# EAGLE board side panel V5.1 (EAGLE 8.3.1)
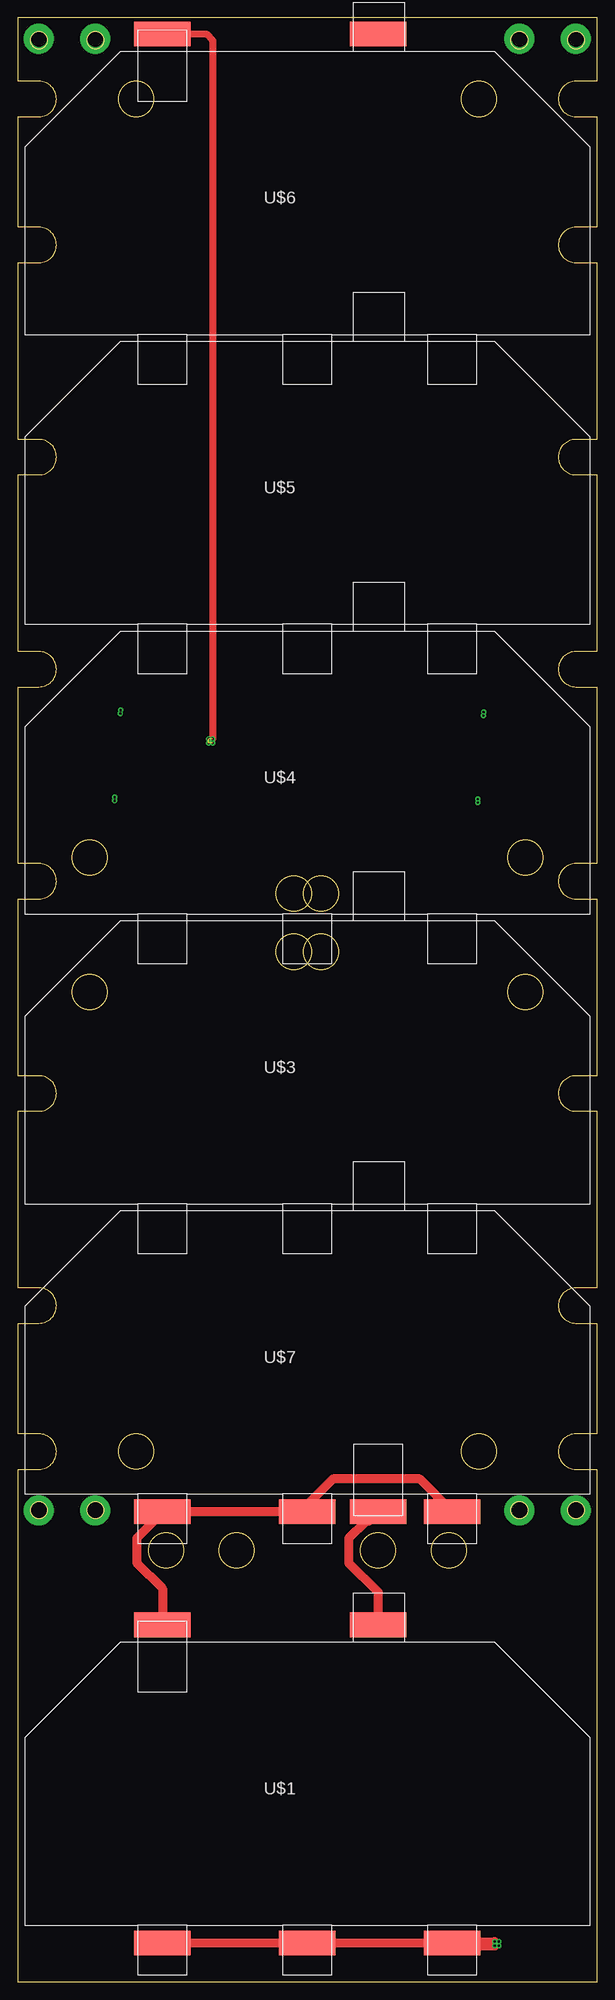
[diagram p0: board, top side]
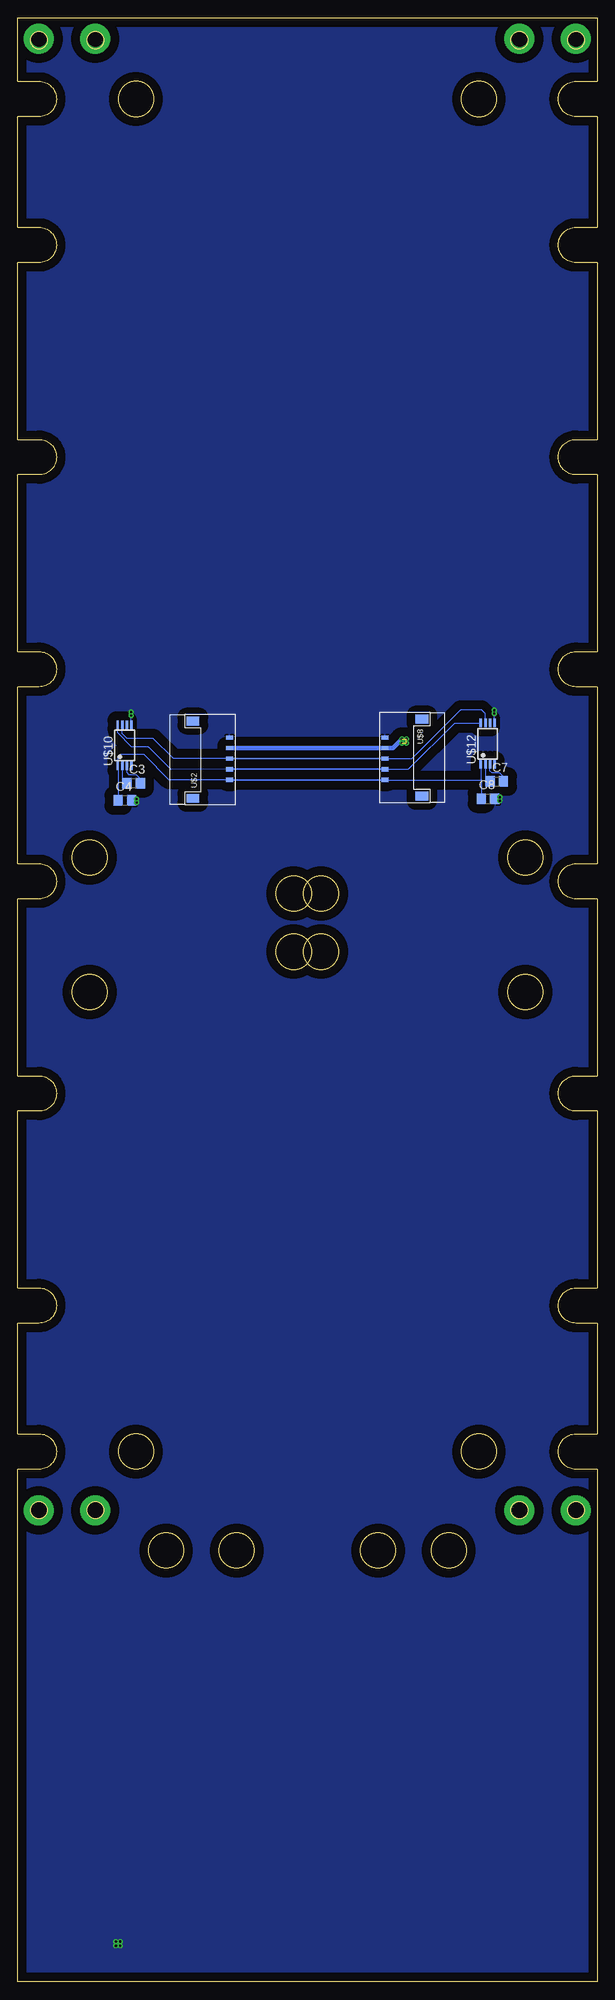
[diagram p1: board, bottom side, seen from below]

Size 82 x 277.8 mm. Coordinates in mm from the lower left corner, seen from the top.
Outline: 79,248.15 arc180 79,243.15 82,243.15 82,218.15 79,218.15 arc180 79,213.15 82,213.15 82,188.15 79,188.15 arc180 79,183.15 82,183.15 82,158.15 79,158.15 arc180 79,153.15 82,153.15 82,128.15 79,128.15 arc180 79,123.15 82,123.15 82,98.15 79,98.15 arc180 79,93.15 82,93.15 82,77.5 79,77.5 arc180 79,72.5 82,72.5 82,0 0,0 0,72.5 3,72.5 arc180 3,77.5 0,77.5 0,93.15 3,93.15 arc180 3,98.15 0,98.15 0,123.15 3,123.15 arc180 3,128.15 0,128.15 0,153.15 3,153.15 arc180 3,158.15 0,158.15 0,183.15 3,183.15 arc180 3,188.15 0,188.15 0,213.15 3,213.15 arc180 3,218.15 0,218.15 0,243.15 3,243.15 arc180 3,248.15 0,248.15 0,263.8 3,263.8 arc180 3,268.8 0,268.8 0,277.8 82,277.8 82,268.8 79,268.8 arc180 79,263.8 82,263.8 82,248.15 79,248.15
Outline: circle at 21,61 radius 2.5
Outline: circle at 65.26,75 radius 2.5
Outline: circle at 51,61 radius 2.5
Outline: circle at 65.26,266.3 radius 2.5
Outline: circle at 16.74,75 radius 2.5
Outline: circle at 16.74,266.3 radius 2.5
Outline: circle at 61,61 radius 2.5
Outline: circle at 31,61 radius 2.5
Outline: circle at 3,274.6 radius 1.19
Outline: circle at 11,274.6 radius 1.19
Outline: circle at 11,66.7 radius 1.19
Outline: circle at 3,66.7 radius 1.19
Outline: circle at 71,66.7 radius 1.19
Outline: circle at 79,66.7 radius 1.19
Outline: circle at 71,274.6 radius 1.19
Outline: circle at 79,274.6 radius 1.19
Outline: circle at 71.83,139.97 radius 2.5
Outline: circle at 42.93,145.69 radius 2.5
Outline: circle at 42.93,153.94 radius 2.5
Outline: circle at 71.83,159.03 radius 2.5
Copper layers (1*16): Top 0.035mm / dielectric 1.5mm / Bottom 0.035mm
Design rules "default": minimum track width 10mil, minimum drill 24mil, track to track 8mil, track to pad 8mil, pad to pad 8mil, via to via 8mil, smd to smd 8mil, copper to edge 40mil, drill to drill 8mil, minimum pad ring 10mil, minimum via ring 8mil, stop-mask expansion 4mil, vias tented up to drill 0mil, thermal gap 10mil

## Footprints (pad centres in the part's own frame; a part is rotated, then mirrored left to right if it is on the bottom)
R0805 = smd 1.3 x 1.5: 1 -0.95,0; 2 0.95,0
C0805 = smd 1.3 x 1.5: 1 -0.95,0; 2 0.95,0
SOLAR_CELL_STAND-ALONE = smd 8 x 3.5: P$1 19.5,-2.5; P$2 40,-2.5; P$3 60.5,-2.5; P$4 50,42.5; P$5 19.5,42.5
PICOLOCK_5 = smd 1.25 x 1.8: MNT@1 -2.605,5.2; MNT@2 8.305,5.2 | smd 0.6 x 1: P$1 0,0; P$2 1.5,0; P$3 3,0; P$4 4.5,0; P$5 6,0
SOLAR_CELL_TOP_SHORT-PAD = smd 8 x 3.5: P$1 50,42.5; P$2 19.5,42.5
SOLAR_CELL_BOTTOM+BYPASS = smd 8 x 3.5: P$1 19.5,-2.5; P$2 40,-2.5; P$3 60.5,-2.5; P$4 50,-2.5
TSSOP-8 = smd 1.2 x 0.35: 1 -4.175,1.725; 2 -4.175,1.075; 3 -4.175,0.425; 4 -4.175,-0.225; 5 1.675,-0.225; 6 1.675,0.425; 7 1.675,1.075; 8 1.675,1.725

## Placement (x,y rotation side)
C3  100pF  [R0805]  65.59,169.54 0 bottom
C4  [C0805]  66.84,167.1 0 bottom
C7  100pF  [R0805]  14.2,169.78 0 bottom
C8  [C0805]  15.45,167.34 0 bottom
U$1  SOLAR_CELL_STAND-ALONE  [SOLAR_CELL_STAND-ALONE]  1,8 0 top
U$2  PICOLOCK_5  [PICOLOCK_5]  52,170 90 bottom
U$3  SOALAR_CELL_OUTLINE  [SOLAR_CELL_OUTLINE]  1,110 0 top
U$4  SOALAR_CELL_OUTLINE  [SOLAR_CELL_OUTLINE]  1,151 0 top
U$5  SOALAR_CELL_OUTLINE  [SOLAR_CELL_OUTLINE]  1,192 0 top
U$6  SOLAR_CELL_TOP  [SOLAR_CELL_TOP_SHORT-PAD]  1,233 0 top
U$7  SOLAR_CELL_BOTTOM+BYPASS  [SOLAR_CELL_BOTTOM+BYPASS]  1,69 0 top
U$8  PICOLOCK_5  [PICOLOCK_5]  30,176 270 bottom
U$10  TMP411  [TSSOP-8]  66.13,176.13 90 bottom
U$12  TMP411  [TSSOP-8]  14.74,176.37 90 bottom

## Library data of the parts
C3 C7 = Battery board V4.1 - simple signals
C4 C8 = Battery board V4.1 - simple signals; SPICEMODEL: NONE; SPICEPREFIX: C
U$1-U$8 U$10 U$12 = DubSat1 Components

## Nets
GND: C4.2 C8.2 U$1.P$1 U$1.P$2 U$1.P$3 U$2.P$5 U$8.P$1 U$10.5 U$12.5
N$9: U$1.P$4 U$7.P$4
N$10: U$1.P$5 U$7.P$1 U$7.P$2 U$7.P$3
N$13: C3.1 U$10.2
N$14: C3.2 U$10.3
N$17: C7.1 U$12.2
N$18: C7.2 U$12.3
POWER: U$2.P$4 U$6.P$2 U$8.P$2
SCL: U$2.P$2 U$8.P$4 U$10.8 U$12.8
SDA: U$2.P$3 U$8.P$3 U$10.7 U$12.7
VS: C4.1 C8.1 U$2.P$1 U$8.P$5 U$10.1 U$12.1

## Tracks (layer width: path | path; a pad name or v marks a point on that pad's centre or on a via)
GND  (via drill 0.3)
  Top 1.27: U$1.P$1 U$1.P$2 U$1.P$3 | U$1.P$3 61.7,5.7 v67.5,5.7 | U$1.P$3 61.9,5.1 v67.5,5.1
  Bottom 0.152: U$10.5 65.92,177.83 v65.92,179.11 65.94,179.13 v65.94,179.6 | U$12.5 14.53,178.07 v14.53,179.35 14.55,179.37 v14.55,179.84
  other vias: 68.1,5.7 68.1,5.1 65.14,166.8 65.14,167.3 13.75,167.04 13.75,167.54
  pour Bottom (isolate 1.27): 0,0 0,277.8 82,277.8 82,0
N$1  (via drill 2.2 pad 4.24)
  other vias: 3,274.8
N$2  (via drill 2.2 pad 4.24)
  other vias: 11,274.8
N$3  (via drill 2.2 pad 4.24)
  other vias: 3,66.7
N$4  (via drill 2.2 pad 4.24)
  other vias: 11,66.7
N$5  (via drill 2.2 pad 4.24)
  other vias: 79,274.8
N$6  (via drill 2.2 pad 4.24)
  other vias: 71,274.8
N$7  (via drill 2.2 pad 4.24)
  other vias: 79,66.7
N$8  (via drill 2.2 pad 4.24)
  other vias: 71,66.7
N$9
  Top 1.27: U$7.P$4 49.65,65.15 49.28,65.15 46.85,62.72 46.85,59.28 51,55.13 U$1.P$4
N$10
  Top 1.27: U$1.P$5 20.5,55.63 16.85,59.28 16.85,62.72 20.5,66.37 U$7.P$1 U$7.P$2 41,67.5 44.6,71.1 56.9,71.1 U$7.P$3
N$13
  Bottom 0.152: U$10.2 67.2,170.2 C3.1
N$14
  Bottom 0.152: C3.2 64.64,170.2 65.14,170.7 66.24,170.7 66.54,171 66.54,171.95 U$10.3
N$17
  Bottom 0.152: U$12.2 15.81,170.44 C7.1
N$18
  Bottom 0.152: C7.2 13.25,170.44 13.75,170.94 14.85,170.94 15.15,171.24 15.15,172.19 U$12.3
POWER  (via drill 0.3)  (3 unrouted)
  Top 1.016: v27.6,175.8 27.6,274.6 26.7,275.5 U$6.P$2 21,276
  Bottom 0.61: v27.6,175.8 28.9,174.5 U$8.P$2 U$2.P$4
  other vias: 27,175.8 27,175.2 27.6,175.2
SCL
  Bottom 0.152: U$8.P$4 26.72,171.5 20.16,178.06 16.47,178.06 U$12.8 | U$2.P$2 60.28,171.49 63.48,174.61 65.85,174.62 67.83,176.68 U$10.8
  Bottom 0.2: U$8.P$4 U$2.P$2
SDA
  Bottom 0.152: U$8.P$3 26.23,173 19.31,179.92 16.37,179.92 15.9,179.45 15.9,178.14 U$12.7 | U$2.P$3 59.94,173 62.81,175.87 66.51,175.87 67.2,176.56 U$10.7
  Bottom 0.2: U$8.P$3 U$2.P$3
VS
  Bottom 0.152: 43.44,169.97 43.41,170 43.45,170 | 16.4,170.03 C8.1 | 16.4,170.03 16.4,172.14 U$12.1 | 67.79,171.6 C4.1 | 67.79,171.6 67.79,171.9 U$10.1 | U$2.P$1 60.55,170 64.1,173.55 67.5,173.55 67.85,173.2 67.85,171.66 67.79,171.6 | U$8.P$5 16.43,170 16.4,170.03
  Bottom 0.2: 43.41,170 U$8.P$5 | 43.45,170 U$2.P$1